# EAGLE board Our-Morse (EAGLE 9.7.0)

Size 359.79 x 168.07 mm. Coordinates in mm from the lower left corner, seen from the top.
Outline: 0,0 359.79,0 359.79,168.06 0,168.06 0,0
Copper layers (1*16): Top 0.035mm / dielectric 1.5mm / Bottom 0.035mm
Design rules "default": minimum track width 6mil, minimum drill 0.35mm, track to track 6mil, track to pad 6mil, pad to pad 6mil, via to via 6mil, smd to smd 6mil, copper to edge 40mil, drill to drill 6mil, minimum pad ring 10mil, minimum via ring 8mil, stop-mask expansion 4mil, vias tented up to drill 0mil, thermal gap 10mil

## Footprints (pad centres in the part's own frame; a part is rotated, then mirrored left to right if it is on the bottom)
PIEZO = drill 1 pad 1.6: 1 -3.5,0; 2 3.5,0
RESAD1016W63L850D250B = drill 0.83 pad 1.43: 1 -5.08,0; 2 5.08,0
SWITCH-MOMENTARY-PTH-6.5MM = drill 1.016 pad 1.88: 1 -3.251,2.261; 2 3.251,2.261; 3 -3.251,-2.261; 4 3.251,-2.261
ARDUINO-UNO-R3-SHIELD = drill 1.016 pad 1.88: 3.3V 24.13,-2.54; 5V 24.13,0; A0 24.13,12.7; A1 24.13,15.24; A2 24.13,17.78; A3 24.13,20.32; A4 24.13,22.86; A5 24.13,25.4; AREF -24.13,-13.97; D2 -24.13,20.32; D3 -24.13,17.78; D4 -24.13,15.24; D5 -24.13,12.7; D6 -24.13,10.16; D7 -24.13,7.62; D8 -24.13,3.81; D9 -24.13,1.27; D10 -24.13,-1.27; D11 -24.13,-3.81; D12 -24.13,-6.35; D13 -24.13,-8.89; GND@0 24.13,2.54; GND@1 24.13,5.08; GND@2 -24.13,-11.43; IOREF 24.13,-7.62; NC 24.13,-10.16; RES 24.13,-5.08; RX -24.13,25.4; SCL -24.13,-19.05; SDA -24.13,-16.51; TX -24.13,22.86; VIN 24.13,7.62
LCD-I2C = drill 1.016 long: 1 -19.05,-5.08; 2 -19.05,-7.62; 3 -19.05,-10.16; 4 -19.05,-12.7

## Placement (x,y rotation side)
PIEZO1  PIEZO  [PIEZO]  13.58,140.05 270 top
PIEZO2  PIEZO  [PIEZO]  208.86,139.01 270 top
R1  10k  [RESAD1016W63L850D250B]  82.16,159.1 90 top
R2  10k  [RESAD1016W63L850D250B]  69.46,159.1 90 top
R3  10k  [RESAD1016W63L850D250B]  56.76,159.1 90 top
R4  10k  [RESAD1016W63L850D250B]  44.06,159.1 90 top
R5  10k  [RESAD1016W63L850D250B]  31.36,159.1 90 top
R6  10k  [RESAD1016W63L850D250B]  18.66,159.1 90 top
R7  10k  [RESAD1016W63L850D250B]  16.12,123.54 90 top
R8  10k  [RESAD1016W63L850D250B]  213.94,158.06 90 top
R9  10k  [RESAD1016W63L850D250B]  226.64,158.06 90 top
R10  10k  [RESAD1016W63L850D250B]  239.34,158.06 90 top
R11  10k  [RESAD1016W63L850D250B]  252.04,158.06 90 top
R12  10k  [RESAD1016W63L850D250B]  264.74,158.06 90 top
R13  10k  [RESAD1016W63L850D250B]  277.44,158.06 90 top
R14  10k  [RESAD1016W63L850D250B]  211.4,122.5 90 top
S1  SWITCH_MOMENTARY  [SWITCH-MOMENTARY-PTH-6.5MM]  279.98,139.01 90 top
S2  SWITCH_MOMENTARY  [SWITCH-MOMENTARY-PTH-6.5MM]  267.28,139.01 90 top
S3  SWITCH_MOMENTARY  [SWITCH-MOMENTARY-PTH-6.5MM]  254.58,139.01 90 top
S4  SWITCH_MOMENTARY  [SWITCH-MOMENTARY-PTH-6.5MM]  241.88,139.01 90 top
S5  SWITCH_MOMENTARY  [SWITCH-MOMENTARY-PTH-6.5MM]  229.18,139.01 90 top
S6  SWITCH_MOMENTARY  [SWITCH-MOMENTARY-PTH-6.5MM]  216.48,139.01 90 top
SBACK  SWITCH_MOMENTARY  [SWITCH-MOMENTARY-PTH-6.5MM]  46.6,140.05 90 top
SDASH  SWITCH_MOMENTARY  [SWITCH-MOMENTARY-PTH-6.5MM]  72,140.05 90 top
SDOT  SWITCH_MOMENTARY  [SWITCH-MOMENTARY-PTH-6.5MM]  84.7,140.05 90 top
SEND_LETTER  SWITCH_MOMENTARY  [SWITCH-MOMENTARY-PTH-6.5MM]  59.3,140.05 90 top
SSEND  SWITCH_MOMENTARY  [SWITCH-MOMENTARY-PTH-6.5MM]  33.9,140.05 90 top
SSPACE  SWITCH_MOMENTARY  [SWITCH-MOMENTARY-PTH-6.5MM]  21.2,140.05 90 top
U1  ARDUINO-UNO-R3-SHIELD  [ARDUINO-UNO-R3-SHIELD]  51.82,74.13 270 top
U2  LCD-16X2-I2CSUNFOUNDER-IIC  [LCD-I2C]  124.37,49.99 0 top
U3  ARDUINO-UNO-R3-SHIELD  [ARDUINO-UNO-R3-SHIELD]  249.24,72.6 270 top
U4  LCD-16X2-I2CSUNFOUNDER-IIC  [LCD-I2C]  304.17,36.63 0 top

## Library data of the parts
PIEZO1 PIEZO2 R1-R14 S1-S6 SBACK SDASH SDOT SEND_LETTER SSEND SSPACE U1-U4 = Tinkercad

## Nets
PIEZO1_2: PIEZO1.2 R7.2
PIEZO2_2: PIEZO2.2 R14.2
U1_5V: SBACK.3 SBACK.4 SDASH.3 SDASH.4 SDOT.3 SDOT.4 SEND_LETTER.3 SEND_LETTER.4 SSEND.3 SSEND.4 SSPACE.3 SSPACE.4 U1.5V U2.2
U1_A4: U1.A4 U2.3
U1_A5: U1.A5 U2.4
U1_D2: R1.1 SDOT.1 SDOT.2 U1.D2
U1_D3: R2.1 SDASH.1 SDASH.2 U1.D3
U1_D4: R3.1 SEND_LETTER.1 SEND_LETTER.2 U1.D4
U1_D5: R4.1 SBACK.1 SBACK.2 U1.D5
U1_D6: R5.1 SSEND.1 SSEND.2 U1.D6
U1_D7: R6.1 SSPACE.1 SSPACE.2 U1.D7
U1_D9: PIEZO1.1 U1.D9
U1_GND: R1.2 R2.2 R3.2 R4.2 R5.2 R6.2 R7.1 R8.2 R9.2 R10.2 R11.2 R12.2 R13.2 R14.1 U1.GND@0 U1.GND@1 U1.GND@2 U2.1 U3.GND@0 U3.GND@1 U3.GND@2 U4.1
U1_TX: U1.TX U3.RX
U3_5V: S1.3 S1.4 S2.3 S2.4 S3.3 S3.4 S4.3 S4.4 S5.3 S5.4 S6.3 S6.4 U3.5V U4.2
U3_A4: U3.A4 U4.3
U3_A5: U3.A5 U4.4
U3_D2: R13.1 S1.1 S1.2 U3.D2
U3_D3: R12.1 S2.1 S2.2 U3.D3
U3_D4: R11.1 S3.1 S3.2 U3.D4
U3_D5: R10.1 S4.1 S4.2 U3.D5
U3_D6: R9.1 S5.1 S5.2 U3.D6
U3_D7: R8.1 S6.1 S6.2 U3.D7
U3_D9: PIEZO2.1 U3.D9
U3_TX: U1.RX U3.TX

## Tracks (layer width: path | path; a pad name or v marks a point on that pad's centre or on a via)
PIEZO1_2  (1 unrouted)
PIEZO2_2  (1 unrouted)
U1_5V  (13 unrouted)
U1_A4  (1 unrouted)
U1_A5  (1 unrouted)
U1_D2  (3 unrouted)
U1_D3  (3 unrouted)
U1_D4  (3 unrouted)
U1_D5  (3 unrouted)
U1_D6  (3 unrouted)
U1_D7  (3 unrouted)
U1_D9  (1 unrouted)
U1_GND  (21 unrouted)
U1_TX  (1 unrouted)
U3_5V  (13 unrouted)
U3_A4  (1 unrouted)
U3_A5  (1 unrouted)
U3_D2  (3 unrouted)
U3_D3  (3 unrouted)
U3_D4  (3 unrouted)
U3_D5  (3 unrouted)
U3_D6  (3 unrouted)
U3_D7  (3 unrouted)
U3_D9  (1 unrouted)
U3_TX  (1 unrouted)